# EAGLE board LED_Cube (EAGLE 7.6.0)

Size 73.58 x 63.39 mm. Coordinates in mm from the lower left corner, seen from the top.
Outline: 0,0 56.82,0 56.82,53.33 0,53.33 0,0
Copper layers (1*16): Top 0.035mm / dielectric 1.5mm / Bottom 0.035mm
Design rules "default": minimum track width 10mil, minimum drill 24mil, track to track 8mil, track to pad 8mil, pad to pad 8mil, via to via 8mil, smd to smd 8mil, copper to edge 40mil, drill to drill 8mil, minimum pad ring 10mil, minimum via ring 8mil, stop-mask expansion 4mil, vias tented up to drill 0mil, thermal gap 10mil

## Footprints (pad centres in the part's own frame; a part is rotated, then mirrored left to right if it is on the bottom)
LED5MM = drill 0.813 octagon: A -1.27,0; K 1.27,0
0207/10 = drill 0.813 octagon: 1 -5.08,0; 2 5.08,0
ARDUINO_UNO = drill 1.016 pad 1.88: 0 63.5,50.8; 1 60.96,50.8; 2 58.42,50.8; 3 55.88,50.8; 3.3V 35.56,2.54; 4 53.34,50.8; 5 50.8,50.8; 5V 38.1,2.54; 6 48.26,50.8; 7 45.72,50.8; 8 41.656,50.8; 9 39.116,50.8; 10 36.576,50.8; 11 34.036,50.8; 12 31.496,50.8; 13 28.956,50.8; A0 50.8,2.54; A1 53.34,2.54; A2 55.88,2.54; A3 58.42,2.54; A4 60.96,2.54; A5 63.5,2.54; AREF 23.876,50.8; GND 26.416,50.8; GND. 43.18,2.54; GND.. 40.64,2.54; I/OREF 30.48,2.54; N/C 27.94,2.54; RESET 33.02,2.54; SCL 18.796,50.8; SDA 21.336,50.8; VIN 45.72,2.54 | hole 3.2: 66.04,7.62; 66.04,35.56; 15.24,50.8; 13.97,2.54

## Placement (x,y rotation side)
D1  [LED5MM]  5,22.78 0 top
D2  [LED5MM]  5,35.48 0 top
D3  [LED5MM]  5,48.18 0 top
D4  [LED5MM]  5,60.88 0 top
D5  [LED5MM]  5,73.58 0 top  (outside the outline)
D6  [LED5MM]  5,86.28 0 top  (outside the outline)
D7  [LED5MM]  5,98.98 0 top  (outside the outline)
D8  [LED5MM]  5,111.68 0 top  (outside the outline)
D9  [LED5MM]  5,124.38 0 top  (outside the outline)
D10  [LED5MM]  5,137.08 0 top  (outside the outline)
D11  [LED5MM]  5,149.78 0 top  (outside the outline)
D12  [LED5MM]  5,162.48 0 top  (outside the outline)
D13  [LED5MM]  5,175.18 0 top  (outside the outline)
D14  [LED5MM]  5,187.88 0 top  (outside the outline)
D15  [LED5MM]  5,200.58 0 top  (outside the outline)
D16  [LED5MM]  5,213.28 0 top  (outside the outline)
D237  [LED5MM]  5,225.98 0 top  (outside the outline)
D238  [LED5MM]  5,238.68 0 top  (outside the outline)
D239  [LED5MM]  5,251.38 0 top  (outside the outline)
D240  [LED5MM]  5,264.08 0 top  (outside the outline)
D241  [LED5MM]  5,276.78 0 top  (outside the outline)
D242  [LED5MM]  5,289.48 0 top  (outside the outline)
D243  [LED5MM]  5,302.18 0 top  (outside the outline)
D244  [LED5MM]  5,314.88 0 top  (outside the outline)
D245  [LED5MM]  5,327.58 0 top  (outside the outline)
D246  [LED5MM]  5,340.28 0 top  (outside the outline)
D247  [LED5MM]  5,352.98 0 top  (outside the outline)
D248  [LED5MM]  5,365.68 0 top  (outside the outline)
D249  [LED5MM]  5,378.38 0 top  (outside the outline)
D250  [LED5MM]  5,391.08 0 top  (outside the outline)
D251  [LED5MM]  5,403.78 0 top  (outside the outline)
D252  [LED5MM]  5,416.48 0 top  (outside the outline)
D253  [LED5MM]  5,429.18 0 top  (outside the outline)
D254  [LED5MM]  5,441.88 0 top  (outside the outline)
D255  [LED5MM]  5,454.58 0 top  (outside the outline)
D256  [LED5MM]  5,467.28 0 top  (outside the outline)
D257  [LED5MM]  5,479.98 0 top  (outside the outline)
D258  [LED5MM]  5,492.68 0 top  (outside the outline)
D259  [LED5MM]  5,505.38 0 top  (outside the outline)
D260  [LED5MM]  5,518.08 0 top  (outside the outline)
D261  [LED5MM]  5,530.78 0 top  (outside the outline)
D262  [LED5MM]  5,543.48 0 top  (outside the outline)
D263  [LED5MM]  5,556.18 0 top  (outside the outline)
D264  [LED5MM]  5,568.88 0 top  (outside the outline)
D265  [LED5MM]  5,581.58 0 top  (outside the outline)
D266  [LED5MM]  5,594.28 0 top  (outside the outline)
D267  [LED5MM]  5,606.98 0 top  (outside the outline)
D268  [LED5MM]  5,619.68 0 top  (outside the outline)
D269  [LED5MM]  5,632.38 0 top  (outside the outline)
D270  [LED5MM]  5,645.08 0 top  (outside the outline)
D271  [LED5MM]  5,657.78 0 top  (outside the outline)
D272  [LED5MM]  5,670.48 0 top  (outside the outline)
D273  [LED5MM]  5,683.18 0 top  (outside the outline)
D274  [LED5MM]  5,695.88 0 top  (outside the outline)
D275  [LED5MM]  5,708.58 0 top  (outside the outline)
D276  [LED5MM]  5,721.28 0 top  (outside the outline)
D277  [LED5MM]  5,733.98 0 top  (outside the outline)
D278  [LED5MM]  5,746.68 0 top  (outside the outline)
D279  [LED5MM]  5,759.38 0 top  (outside the outline)
D280  [LED5MM]  5,772.08 0 top  (outside the outline)
D281  [LED5MM]  5,784.78 0 top  (outside the outline)
D282  [LED5MM]  5,797.48 0 top  (outside the outline)
D283  [LED5MM]  5,810.18 0 top  (outside the outline)
D284  [LED5MM]  5,822.88 0 top  (outside the outline)
R2  220‎Ω  [0207/10]  5,835.58 0 top  (outside the outline)
R3  220‎Ω  [0207/10]  5,848.28 0 top  (outside the outline)
R4  220‎Ω  [0207/10]  5,860.98 0 top  (outside the outline)
R5  220‎Ω  [0207/10]  5,873.68 0 top  (outside the outline)
U1  [ARDUINO_UNO]  5,10.08 0 top

## Library data of the parts
D1-D16 D237-D284 R2-R5 U1 = AUTODESK_CIRCUITS_BREADBOARD

## Nets
N$1: D269.A D270.A D271.A D272.A D273.A D274.A D275.A D276.A D277.A D278.A D279.A D280.A D281.A D282.A D283.A D284.A R2.2
N$2: D1.A D2.A D3.A D4.A D5.A D6.A D7.A D8.A D9.A D10.A D11.A D12.A D13.A D14.A D15.A D16.A R3.2
N$3: D237.A D238.A D239.A D240.A D241.A D242.A D243.A D244.A D245.A D246.A D247.A D248.A D249.A D250.A D251.A D252.A R4.2
N$4: D253.A D254.A D255.A D256.A D257.A D258.A D259.A D260.A D261.A D262.A D263.A D264.A D265.A D266.A D267.A D268.A R5.2
N$5: D16.K D248.K D264.K D280.K U1.13
N$6: D15.K D245.K D261.K D277.K U1.12
N$7: D14.K D243.K D259.K D275.K U1.11
N$8: D13.K D242.K D258.K D274.K U1.10
N$9: D12.K D247.K D263.K D279.K U1.9
N$10: D8.K D249.K D265.K D281.K U1.5
N$11: D1.K D252.K D268.K D284.K U1.1
N$12: D11.K D246.K D262.K D278.K U1.8
N$13: D7.K D250.K D266.K D282.K U1.4
N$14: D2.K D251.K D267.K D283.K U1.0
N$15: D10.K D244.K D260.K D276.K U1.7
N$16: D6.K D237.K D253.K D269.K U1.3
N$17: D3.K D238.K D254.K D270.K U1.A5
N$18: D9.K D241.K D257.K D273.K U1.6
N$19: D5.K D240.K D256.K D272.K U1.2
N$20: D4.K D239.K D255.K D271.K U1.A4
N$21: R2.1 U1.A0
N$22: R3.1 U1.A1
N$23: R4.1 U1.A2
N$24: R5.1 U1.A3

## Tracks (layer width: path | path; a pad name or v marks a point on that pad's centre or on a via)
N$1  (16 unrouted)
N$2  (16 unrouted)
N$3  (16 unrouted)
N$4  (16 unrouted)
N$5  (4 unrouted)
N$6  (4 unrouted)
N$7  (4 unrouted)
N$8  (4 unrouted)
N$9  (4 unrouted)
N$10  (4 unrouted)
N$11  (4 unrouted)
N$12  (4 unrouted)
N$13  (4 unrouted)
N$14  (4 unrouted)
N$15  (4 unrouted)
N$16  (4 unrouted)
N$17  (4 unrouted)
N$18  (4 unrouted)
N$19  (4 unrouted)
N$20  (4 unrouted)
N$21  (1 unrouted)
N$22  (1 unrouted)
N$23  (1 unrouted)
N$24  (1 unrouted)